# EAGLE board Gorden_ (EAGLE 7.6.0)
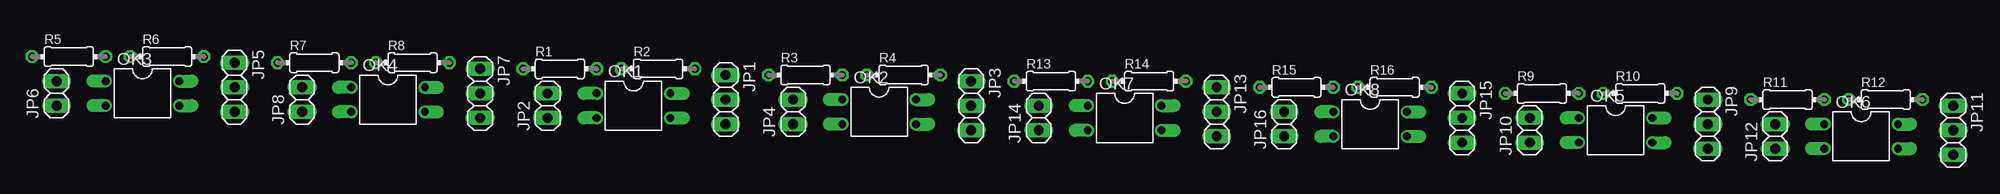
[diagram p0: board, top side]
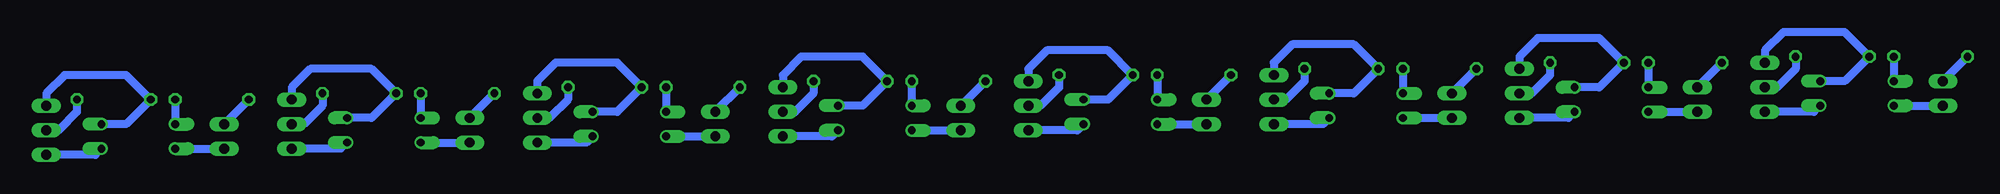
[diagram p1: board, bottom side, seen from below]

No outline drawn. Coordinates in mm, seen from the top.
Copper layers (1*16): Top 0.035mm / dielectric 1.5mm / Bottom 0.035mm
Design rules "default": minimum track width 10mil, minimum drill 24mil, track to track 8mil, track to pad 8mil, pad to pad 8mil, via to via 8mil, smd to smd 8mil, copper to edge 40mil, drill to drill 8mil, minimum pad ring 10mil, minimum via ring 8mil, stop-mask expansion 4mil, vias tented up to drill 0mil, thermal gap 10mil

## Footprints (pad centres in the part's own frame; a part is rotated, then mirrored left to right if it is on the bottom)
1X03 = drill 1.016 long: 1 -2.54,0; 2 0,0; 3 2.54,0
1X02 = drill 1.016 long: 1 -1.27,0; 2 1.27,0
DIL04 = drill 0.813 offset: 1 -1.27,-3.81; 2 1.27,-3.81; 3 1.27,3.81; 4 -1.27,3.81
0204/7 = drill 0.813 octagon: 1 -3.81,0; 2 3.81,0

## Placement (x,y rotation side)
JP1  [1X03]  43.81,28.57 270 top
JP2  [1X02]  25.4,27.94 90 top
JP3  [1X03]  69.22,27.94 270 top
JP4  [1X02]  50.8,27.3 90 top
JP5  [1X03]  -6.99,29.84 270 top
JP6  [1X02]  -25.4,29.21 90 top
JP7  [1X03]  18.41,29.21 270 top
JP8  [1X02]  0,28.57 90 top
JP9  [1X03]  145.41,26.04 270 top
JP10  [1X02]  127,25.4 90 top
JP11  [1X03]  170.81,25.4 270 top
JP12  [1X02]  152.4,24.77 90 top
JP13  [1X03]  94.61,27.3 270 top
JP14  [1X02]  76.2,26.67 90 top
JP15  [1X03]  120.02,26.67 270 top
JP16  [1X02]  101.6,26.04 90 top
OK1  PC817  [DIL04]  34.29,27.94 270 top
OK2  PC817  [DIL04]  59.69,27.3 270 top
OK3  PC817  [DIL04]  -16.51,29.21 270 top
OK4  PC817  [DIL04]  8.89,28.57 270 top
OK5  PC817  [DIL04]  135.89,25.4 270 top
OK6  PC817  [DIL04]  161.29,24.77 270 top
OK7  PC817  [DIL04]  85.09,26.67 270 top
OK8  PC817  [DIL04]  110.49,26.04 270 top
R1  [0204/7]  26.67,31.75 0 top
R2  [0204/7]  36.83,31.75 0 top
R3  [0204/7]  52.07,31.11 0 top
R4  [0204/7]  62.23,31.11 0 top
R5  [0204/7]  -24.13,33.02 0 top
R6  [0204/7]  -13.97,33.02 0 top
R7  [0204/7]  1.27,32.38 0 top
R8  [0204/7]  11.43,32.38 0 top
R9  [0204/7]  128.27,29.21 0 top
R10  [0204/7]  138.43,29.21 0 top
R11  [0204/7]  153.67,28.57 0 top
R12  [0204/7]  163.83,28.57 0 top
R13  [0204/7]  77.47,30.48 0 top
R14  [0204/7]  87.63,30.48 0 top
R15  [0204/7]  102.87,29.84 0 top
R16  [0204/7]  113.03,29.84 0 top

## Library data of the parts
JP1-JP16 = pinhead
OK1-OK8 = optocoupler; MPN: PC817X4J000F; OC_FARNELL: 9707727; OC_NEWARK: 97K7059
R1-R16 = rcl

## Nets
N$1: JP1.3 OK1.3
N$2: OK1.1 R1.2
N$3: JP1.1 OK1.4 R2.1
N$4: JP1.2 R2.2
N$5: JP2.2 R1.1
N$6: JP2.1 OK1.2
N$7: OK2.1 R3.2
N$8: JP3.3 OK2.3
N$9: JP3.1 OK2.4 R4.1
N$10: JP3.2 R4.2
N$11: JP4.2 R3.1
N$12: JP4.1 OK2.2
N$13: OK3.1 R5.2
N$14: JP5.3 OK3.3
N$15: JP5.1 OK3.4 R6.1
N$16: JP5.2 R6.2
N$17: JP6.2 R5.1
N$18: JP6.1 OK3.2
N$19: OK4.1 R7.2
N$20: JP7.3 OK4.3
N$21: JP7.1 OK4.4 R8.1
N$22: JP7.2 R8.2
N$23: JP8.2 R7.1
N$24: JP8.1 OK4.2
N$25: OK5.1 R9.2
N$26: JP9.3 OK5.3
N$27: JP9.1 OK5.4 R10.1
N$28: JP9.2 R10.2
N$29: JP10.2 R9.1
N$30: JP10.1 OK5.2
N$31: OK6.1 R11.2
N$32: JP11.3 OK6.3
N$33: JP11.1 OK6.4 R12.1
N$34: JP11.2 R12.2
N$35: JP12.2 R11.1
N$36: JP12.1 OK6.2
N$37: OK7.1 R13.2
N$38: JP13.3 OK7.3
N$39: JP13.1 OK7.4 R14.1
N$40: JP13.2 R14.2
N$41: JP14.2 R13.1
N$42: JP14.1 OK7.2
N$43: OK8.1 R15.2
N$44: JP15.3 OK8.3
N$45: JP15.1 OK8.4 R16.1
N$46: JP15.2 R16.2
N$47: JP16.2 R15.1
N$48: JP16.1 OK8.2

## Tracks (layer width: path | path; a pad name or v marks a point on that pad's centre or on a via)
N$1
  Bottom 0.813: OK1.3 38.73,26.04 JP1.3
N$2
  Bottom 0.813: R1.2 OK1.1
N$3
  Bottom 0.813: OK1.4 35.56,29.21 R2.1 35.56,34.29 41.91,34.29 43.81,32.38 JP1.1
N$4
  Bottom 0.813: R2.2 40.64,30.48 42.55,28.57 JP1.2
N$5
  Bottom 0.813: R1.1 JP2.2
N$6
  Bottom 0.813: OK1.2 JP2.1
N$7
  Bottom 0.813: R3.2 OK2.1
N$8
  Bottom 0.813: OK2.3 64.14,25.4 JP3.3
N$9
  Bottom 0.813: OK2.4 60.96,28.57 R4.1 60.96,33.66 67.31,33.66 69.22,31.75 JP3.1
N$10
  Bottom 0.813: R4.2 66.04,29.84 67.94,27.94 JP3.2
N$11
  Bottom 0.813: R3.1 JP4.2
N$12
  Bottom 0.813: OK2.2 JP4.1
N$13
  Bottom 0.813: R5.2 OK3.1
N$14
  Bottom 0.813: OK3.3 -12.06,27.3 JP5.3
N$15
  Bottom 0.813: OK3.4 -15.24,30.48 R6.1 -15.24,35.56 -8.89,35.56 -6.99,33.66 JP5.1
N$16
  Bottom 0.813: R6.2 -10.16,31.75 -8.26,29.84 JP5.2
N$17
  Bottom 0.813: R5.1 JP6.2
N$18
  Bottom 0.813: OK3.2 JP6.1
N$19
  Bottom 0.813: R7.2 OK4.1
N$20
  Bottom 0.813: OK4.3 13.34,26.67 JP7.3
N$21
  Bottom 0.813: OK4.4 10.16,29.84 R8.1 10.16,34.92 16.51,34.92 18.41,33.02 JP7.1
N$22
  Bottom 0.813: R8.2 15.24,31.11 17.14,29.21 JP7.2
N$23
  Bottom 0.813: R7.1 JP8.2
N$24
  Bottom 0.813: OK4.2 JP8.1
N$25
  Bottom 0.813: R9.2 OK5.1
N$26
  Bottom 0.813: OK5.3 140.34,23.5 JP9.3
N$27
  Bottom 0.813: OK5.4 137.16,26.67 R10.1 137.16,31.75 143.51,31.75 145.41,29.84 JP9.1
N$28
  Bottom 0.813: R10.2 142.24,27.94 144.15,26.04 JP9.2
N$29
  Bottom 0.813: R9.1 JP10.2
N$30
  Bottom 0.813: OK5.2 JP10.1
N$31
  Bottom 0.813: R11.2 OK6.1
N$32
  Bottom 0.813: OK6.3 165.74,22.86 JP11.3
N$33
  Bottom 0.813: OK6.4 162.56,26.04 R12.1 162.56,31.11 168.91,31.11 170.81,29.21 JP11.1
N$34
  Bottom 0.813: R12.2 167.64,27.3 169.54,25.4 JP11.2
N$35
  Bottom 0.813: R11.1 JP12.2
N$36
  Bottom 0.813: OK6.2 JP12.1
N$37
  Bottom 0.813: R13.2 OK7.1
N$38
  Bottom 0.813: OK7.3 89.53,24.77 JP13.3
N$39
  Bottom 0.813: OK7.4 86.36,27.94 R14.1 86.36,33.02 92.71,33.02 94.61,31.11 JP13.1
N$40
  Bottom 0.813: R14.2 91.44,29.21 93.34,27.3 JP13.2
N$41
  Bottom 0.813: R13.1 JP14.2
N$42
  Bottom 0.813: OK7.2 JP14.1
N$43
  Bottom 0.813: R15.2 OK8.1
N$44
  Bottom 0.813: OK8.3 114.94,24.13 JP15.3
N$45
  Bottom 0.813: OK8.4 111.76,27.3 R16.1 111.76,32.38 118.11,32.38 120.02,30.48 JP15.1
N$46
  Bottom 0.813: R16.2 116.84,28.57 118.75,26.67 JP15.2
N$47
  Bottom 0.813: R15.1 JP16.2
N$48
  Bottom 0.813: OK8.2 JP16.1